# Altium PCB alarm_to_uart.PcbDoc
Units mm, origin at the board's own origin, x right, y up, seen from the top; angles counter-clockwise.
Board outline 46 x 32 mm, 2 copper layers (Top Layer, Bottom Layer); 22 components, 13 nets, 65 pads, 18 vias.
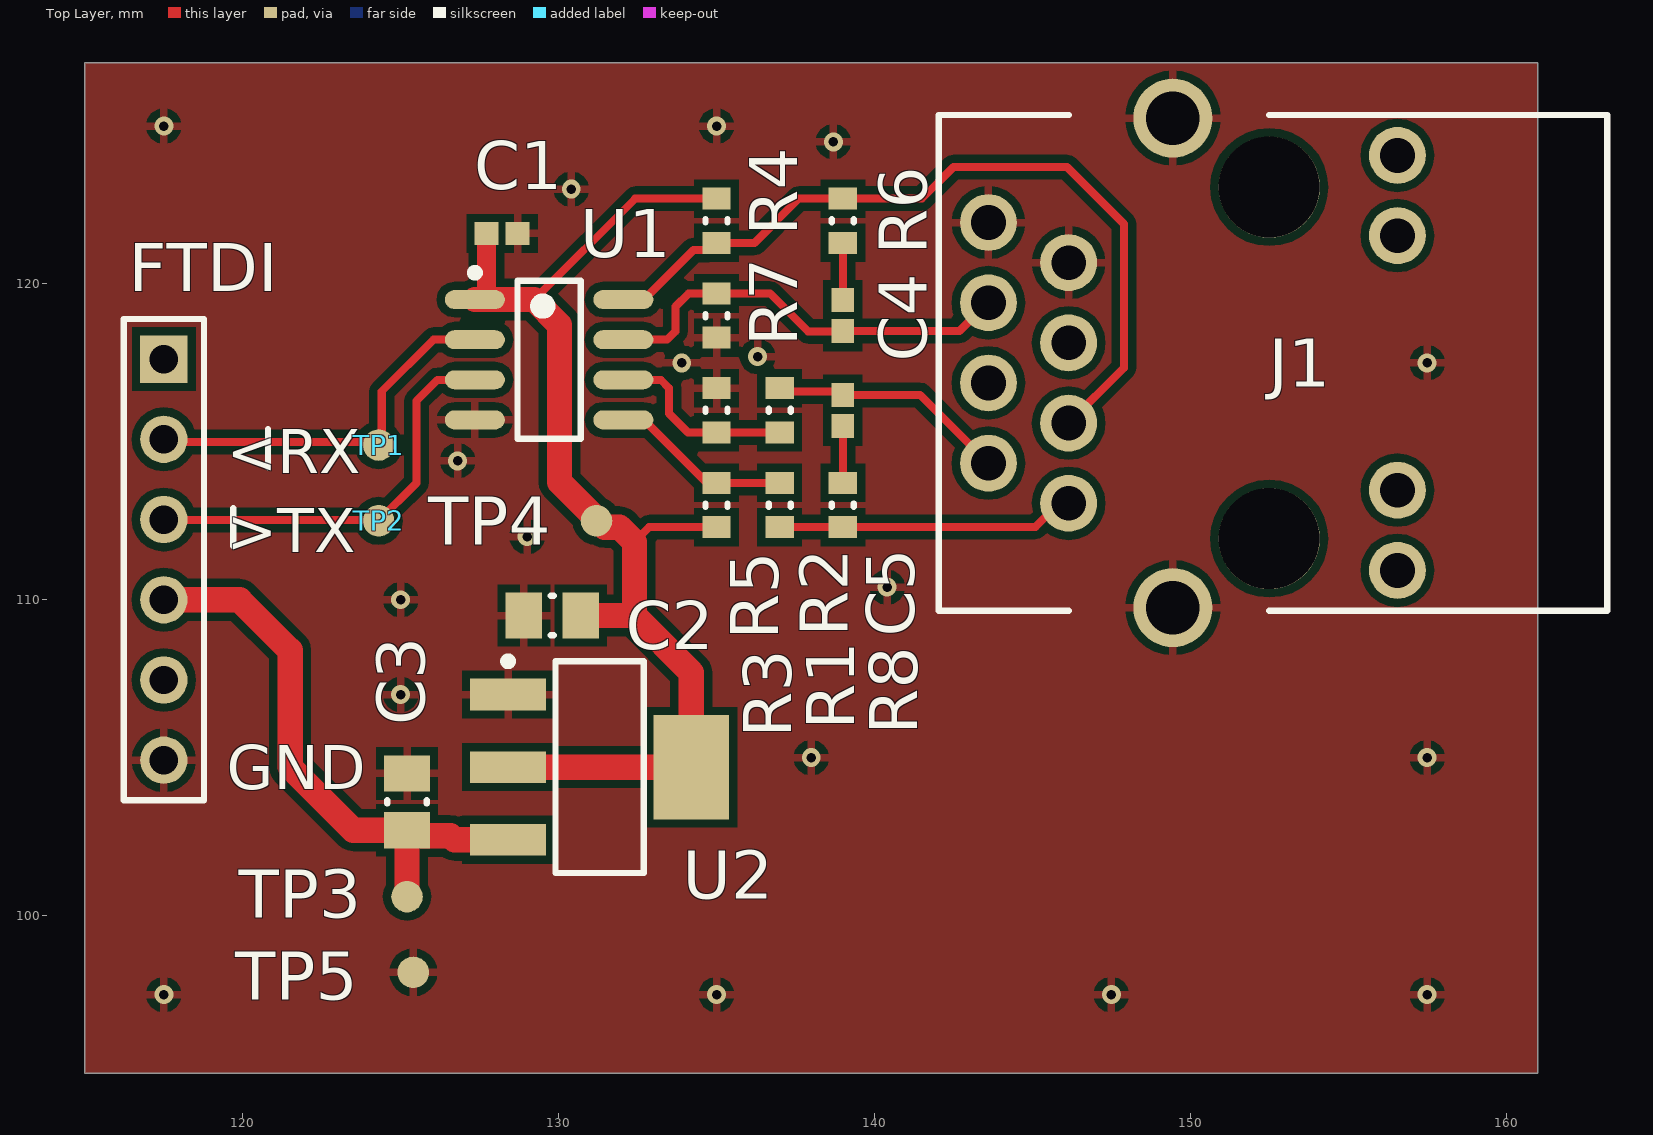
[diagram p0: Top Layer view]
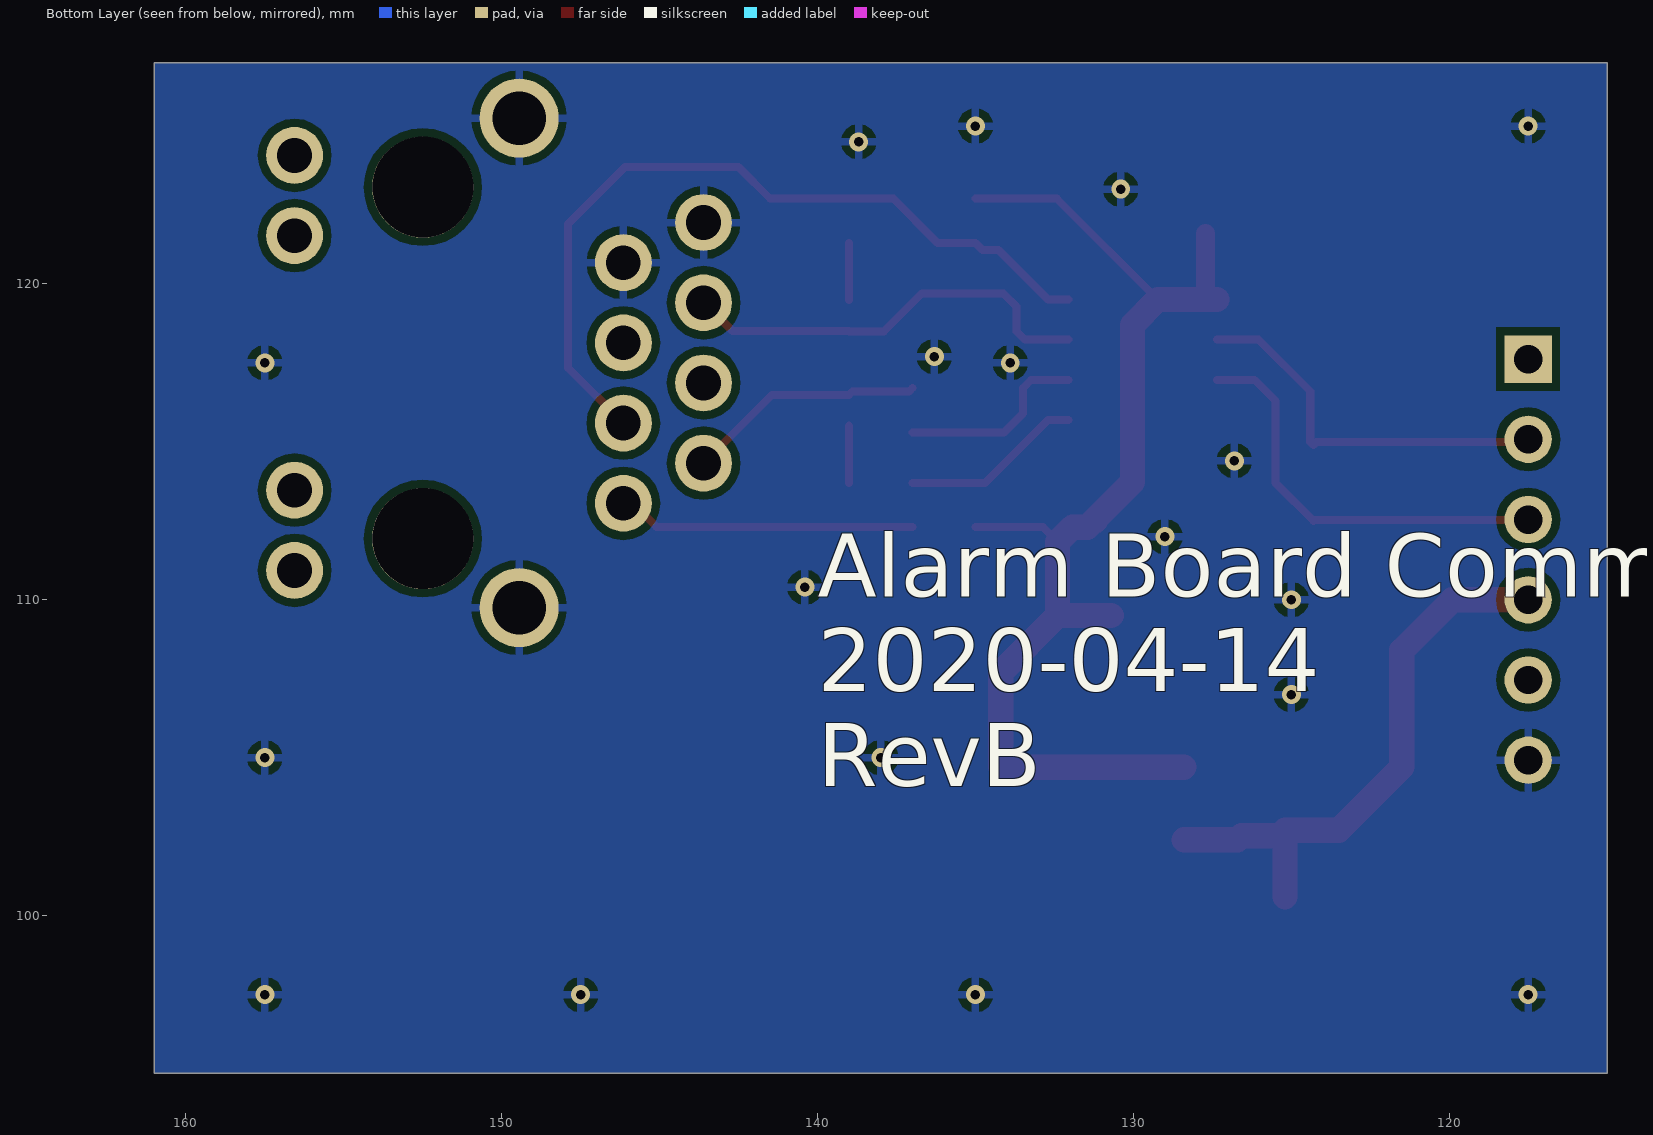
[diagram p1: Bottom Layer view, seen from below]

## Layer stack, top to bottom
Top Solder: solder mask 0.0102, Solder Resist, Dk 3.5
Top Layer: signal copper 0.0356
Dielectric 1: dielectric 0.32, FR-4, Dk 4.8
Bottom Layer: signal copper 0.0356
Bottom Solder: solder mask 0.0102, Solder Resist, Dk 3.5

## Board outline
115,95 161,95 161,127 115,127

## Design rules (kind name [scope] priority, off if disabled: settings)
Clearance [All] p1: gap=0.254 ignorepadtopadclearanceinfootprint=FALSE except(0: Arc-Hole Track-Hole SMDPad-Hole THPad-Hole Via-Hole Fill-Hole Poly-Hole Region-Hole Text-Hole)
PolygonConnect [All] p1: connectstyle=Relief reliefconductorwidth=0.254 reliefentries=4 polygonreliefangle="90 Angle" airgapwidth=0.254
RoomDefinition Sheet4 [InComponentClass('Sheet4')] p1: confinementstyle=ConfineIn formatcopy=TRUE lockcomponents=FALSE outline 105,83 171,83 171,135 105,135
RoutingVias [All] p1: holewidth=0.711 width=1.27 viastyle="Through Hole" minholewidth=0.711 minwidth=1.27 maxholewidth=0.711 maxwidth=1.27
SolderMaskExpansion [All] p1: expansion=0.102 istentingtop=FALSE
Width [All] p1: maxlimit=0.8 minlimit=0.254 preferedwidth=0.254
30 further rules are at their usual default settings.

## Components (designator, comment, footprint, x,y, rotation, side; value= is the part's Value field where it differs from the comment)
C1 "GRM155R71C104KA88D" CAPC1005X55X25ML05T10 128.21,121.6 r180 top
C2 "CAP 10uF 10V 0805(2012)" CAPC0805(2012)145_N 129.8,109.5 r0 top value=10uF
C3 "CAP 10uF 10V 0805(2012)" CAPC0805(2012)145_N 125.2,103.6 r270 top value=10uF
C4 "TBD" CAPC1005X55X25ML05T10 139,119 r90 top
C5 "TBD" CAPC1005X55X25ML05T10 139,116 r270 top
FTDI "Header 6" HDR1X6 117.5,117.62 r270 top
J1 "RJ45_59_8P8C_LED" RJ45_59_8P8C_LED 152.5,117.5 r90 top
R1 "50R" RESC0603(1608)_L 137,113 r90 top value="120.00 Ohm"
R2 "50R" RESC0603(1608)_L 137,116 r270 top value="120.00 Ohm"
R3 "10k" RESC0603(1608)_L 135,113 r90 top value="120.00 Ohm"
R4 "10k" RESC0603(1608)_L 135,122 r270 top value="120.00 Ohm"
R5 "10k" RESC0603(1608)_L 135,116 r90 top value="120.00 Ohm"
R6 "100R" RESC0603(1608)_L 139,122 r270 top value="120.00 Ohm"
R7 "10k" RESC0603(1608)_L 135,119 r270 top value="120.00 Ohm"
R8 "100R" RESC0603(1608)_L 139,113 r90 top value="120.00 Ohm"
TP1 "TEST_POINT" TP-SMD-1mm 124.3,114.9 r270 top
TP2 "TEST_POINT" TP-SMD-1mm 124.299,112.5 r270 top
TP3 "TEST_POINT" TP-SMD-1mm 125.2,100.6 r270 top
TP4 "TEST_POINT" TP-SMD-1mm 131.2,112.5 r270 top
TP5 "TEST_POINT" TP-SMD-1mm 125.4,98.2 r270 top
U1 "ADM3488ARZ" ADI-R-8_L 129.7,117.6 r0 top
U2 "LD1117S33CTR" SOT-223_N 131.3,104.7 r0 top

## Footprints (in the part's own frame and the unit in brackets; to place one, negate y for a bottom-side part, rotate by r counter-clockwise, add the part's x,y. Pads: shape width x height; smd on the part's side, far side on the other; paste and mask are expansions set on the pad)
ADI-R-8_L [mm] "SOIC, 8-Leads, Body 5x4mm, Pitch 1.27mm, IPC High Density"
  oval 1.9x0.6 smd: 1(-2.35,1.905) 2(-2.35,0.635) 3(-2.35,-0.635) 4(-2.35,-1.905) 5(2.35,-1.905) 6(2.35,-0.635) 7(2.35,0.635) 8(2.35,1.905)
  silkscreen extent -2.47,-2.5 1,2.88, body extent -2,-2.5 2,2.5, height 1.75
CAPC0805(2012)145_N [mm] "Chip Capacitor, Body 2.0x1.2mm, Height 1.45mm, IPC Medium Density"
  rect 1.15x1.45 smd: 1(-0.9,0) 2(0.9,0)
  silkscreen extent -0.05,-0.62 0.05,0.63, body extent -1.1,-0.72 1.1,0.73, height 1.45
CAPC1005X55X25ML05T10 [mm] "Chip Capacitor, 2-Leads, Body 1.00x0.50mm, IPC Low Density"
  rect 0.76x0.72 smd: 1(-0.49,0) 2(0.49,0)
  body extent -0.53,-0.28 0.53,0.27, height 0.55
HDR1X6 [mm] "Connector; Header; 6 Position"
  rect 1.5x1.5 hole 0.9: 1(0,0)
  round 1.5 hole 0.9: 2(2.54,0) 3(5.08,0) 4(7.62,0) 5(10.16,0) 6(12.7,0)
  silkscreen extent -1.27,-1.27 13.97,1.27
RESC0603(1608)_L [mm] "Chip Resistor, Body 1.6x0.8mm, IPC High Density"
  rect 0.7x0.9 smd: 1(-0.7,0) 2(0.7,0)
  silkscreen extent -0.05,-0.35 0.05,0.35, body extent -0.85,-0.47 0.85,0.47, height 0.6
RJ45_59_8P8C_LED [mm] "Generic RJ49 jack with LED and without magnetics"
  round 1.8 hole 1.1: 1(-4.445,6.35) 2(-3.175,8.89) 3(-1.905,6.35) 4(-0.635,8.89) 5(0.635,6.35) 6(1.905,8.89) 7(3.175,6.35) 8(4.445,8.89) 9(-6.57,-4.06) 10(-4.03,-4.06) 11(4.03,-4.06) 12(6.57,-4.06)
  round 3.2 hole 3.2 unplated: POS1(-5.565,0) POS2(5.565,0)
  round 2.5 hole 1.7: S1(-7.75,3.05) S2(7.75,3.05)
  silkscreen extent -7.85,-10.7 7.85,10.46, body extent -7.85,-10.58 7.85,10.58, height 13.45
SOT-223_N [mm] "SOT223, 4-Leads, Body 6.5x3.5mm, Pitch 2.3mm, Lead Span 7mm, IPC Medium Density"
  rect 2.4x1 smd: 1(-2.9,2.3) 2(-2.9,0) 3(-2.9,-2.3)
  rect 2.4x3.3 smd: 4(2.9,0)
  silkscreen extent -3.02,-3.35 1.4,3.47, body extent -1.85,-3.35 1.85,3.35, height 1.8
TP-SMD-1mm [mm] "Test point, round, 1mm, SMD"
  round 1 smd paste-999: 1(0,0)

## Part data
C1 C4 C5: library part CMP-2100-03641-1, "Chip Capacitor, 0.1 uF, +/- 10%, 16 V, -55 to 125 degC, 0402 (1005 Metric), RoHS, Tape and Reel", Capacitance=100nF, Case Code (Imperial)=0402, Case Code (Metric)=1005, Dielectric=X7R, Dielectric Material=Ceramic, Insulation Resistance=10GR, Manufacturer=Murata, Max Operating Temperature=125degC, Min Operating Temperature=-55degC, Package Description="2-Pin Surface Mount Device, Body 1 x 0.5 mm", Package Quantity=1, Tolerance=10%, Voltage=16V, Case/Package=0402, Datasheet URL=http://psearch.en.murata.com/capacitor/product/GRM155R71C104KA88%23.pdf, Datasheet Version=42675.0, Depth=0.5mm, Height=0.5mm, Lead Free=LeadFree, Length=1mm, Manufacturer URL=http://www.murata.com/, Material=Ceramic, Mount=SurfaceMount, Number of Pins=2, Package Reference=0402, Packaging=TapeandReel, Radiation Hardening=No, REACH SVHC=NoSVHC, RoHSCompliant=true, Termination=SMD/SMT, Thickness=0.022inch, Voltage Rating=16V, Voltage Rating (DC)=16V, Width=0.5mm
C2 C3: library part CMP-1036-04922-1, "CAP 10uF 10V ±10% 0805 (2012 Metric) Thickness 1.45mm SMD", Case-EIA=0805, Case-Metric=2012, Rated Voltage="10 V", Tolerance=Â±10%, Max Thickness="1.45 mm", Technology=SMT
FTDI: "Header, 6-Pin", LatestRevisionDate=17-Jul-2002, LatestRevisionNote="Re-released for DXP Platform.", Publisher="Altium Limited"
J1: "Generic RJ49 jack with LED and without magnetics", Manufacturer=Unknown/Generic, PartNumber=RJ45_59_8P8C_LED
R1 R2 R3 R4 R5 R6 R7 R8: library part CMP-1012-00052-1, "120R 0.1W 5% 0603 (1608 Metric)  SMD", Case-EIA=0603, Case-Metric=1608, Power="0.1 W", Tolerance="5 %", Technology=SMT
TP1 TP2 TP3 TP4 TP5: "Test point"
U1: library part CMP-0535-00058-1, "3.3 V Slew Rate Limited, Full-Duplex, RS-485/RS-422 Transceivers, 3 to 3.6 V, -40 to 85 degC, 8-Pin SOIC (R-8), RoHS, Tube", Manufacturer="Analog Devices", Supply Voltage="3 to 3.6 V", Temperature Range="-40 to 85 degC", ComponentLink1Description="Manufacturer URL", ComponentLink1URL=http://www.analog.com/en/index.html, ComponentLink2Description=Datasheet, ComponentLink2URL=http://www.analog.com/static/imported-files/data_sheets/ADM3483_3485_3488_3490_3491.pdf, ComponentLink3Description="Package Specification", ComponentLink3URL=http://www.analog.com/media/en/package-pcb-resources/package/pkg_pdf/soic_narrow-r/r_8.pdf, DatasheetVersion="Rev. E", Duplex=Full, Guaranteed Data Rate="0.25 Mbps", Mounting Technology="Surface Mount", Number of Drivers=1, PackageDescription="8-Pin Standard Small Outline Package, Body 4.9 x 3.9 mm, Pitch 1.27 mm", PackageVersion=06/2006, Packing=Tube, PartNumber=ADM3488ARZ, Receiver Hysteresis="50 mV", RoHS=TRUE
U2: library part CMP-0244-00307-1, "Fixed Low Drop Positive Voltage Regulator, 3.3V, 4-Pin SOT-223, Tape and Reel", ComponentLink1Description="Manufacturer URL", ComponentLink1URL=http://www.st.com, ComponentLink2Description=Datasheet, ComponentLink2URL=http://www.st.com/internet/com/TECHNICAL_RESOURCES/TECHNICAL_LITERATURE/DATASHEET/CD00000544.pdf, DatasheetVersion=1/11/2011, PackageDescription="4-Pin SOT-223 Package, 6.5 x 3.5 mm Body, 2.3 mm Pitch, 7 mm Lead Span", PackageReference=SOT-223, PackageVersion=2010

## Via types
v1: diameter 0.6, hole 0.3, Top Layer to Bottom Layer, 18 vias

## Nets (pads, with @x,y where several pads share a name; then routed paths per layer and width w, separated by ;. In a path a pad name is that pad's centre, name@x,y a point inside that pad or via, vN(x,y) a via of type N, cw(c..) or ccw(c..) an arc to the next point about the centre after c; other vN are vias at no path point)
5V: C3.2 FTDI.4 TP3.1 U2.3 | length 18.3
  Top Layer w0.8: FTDI.4 119.9,110 121.5,108.4 121.5,104.7 123.5,102.7 C3.2 ; TP3.1 C3.2 ; U2.3 126.7,102.4 126.575,102.525 125.375,102.525 C3.2
+3.3V: C1.2 C2.2 R3.1 R4.1 TP4.1 U1.1 U2.2 U2.4 | length 38.6
  Top Layer w0.254: 129.231,119.505 132.426,122.7 R4.1 ; 132.4,111.831 132.869,112.3 R3.1
  Top Layer w0.6: U1.1@127.72,119.605 C1.2
  Top Layer w0.8: U1.1 U1.1@127.62,119.505 ; U1.1@127.72,119.605 U1.1@127.62,119.505 ; U2.2 U2.4 134.2,107.7 132.4,109.5 ; C2.2 132.4,109.5 ; U1.1@127.62,119.505 129.231,119.505 130.03,118.706 130.03,113.724 131.2,112.554 TP4.1 131.254,112.5 131.454,112.3 131.931,112.3 132.4,111.831 132.4,109.5
GND: C1.1 C2.1 C3.1 FTDI.6 J1.7 J1.8 J1.S1 J1.S2 R5.2 R7.2 TP5.1 U1.4 U2.1
  other v1: 117.5,97.5 135,97.5 147.5,97.5 157.5,97.5 138,105 157.5,105 125,107 125,110 140.4,110.4 129,112 126.8,114.4 133.9,117.5 157.5,117.5 136.3,117.7 130.4,123 138.7,124.5 117.5,125 135,125
NetC4_2: C4.2 R6.2 | length 1.8
  Top Layer w0.254: C4.2 R6.2
NetC5_2: C5.2 R8.2 | length 1.8
  Top Layer w0.254: R8.2 C5.2
NetR1_2: R1.2 R3.2 U1.5 | length 5.8
  Top Layer w0.254: U1.5 132.7,115.695 134.695,113.7 R3.2 R1.2
NetR2_2: R2.2 R5.1 U1.6 | length 6.1
  Top Layer w0.254: U1.6 133.235,116.965 133.5,116.7 133.5,115.9 134.1,115.3 R5.1 R2.2
SENSOR_RX+: J1.3 R4.2 R6.1 U1.8 | length 25.4
  Top Layer w0.254: U1.8 132.7,119.505 134.272,121.077 134.777,121.077 R4.2 136.2,121.3 137.6,122.7 R6.1 141.5,122.7 142.5,123.7 146.1,123.7 147.9,121.9 147.9,117.345 J1.3
SENSOR_RX-: C4.1 J1.6 R7.1 U1.7 | length 13.5
  Top Layer w0.254: U1.7 133.435,118.235 133.7,118.5 133.7,119.282 134.118,119.7 136.7,119.7 137.9,118.5 138.99,118.5 C4.1 142.693,118.51 143.588,119.405 J1.6
SENSOR_TX+: J1.1 R1.1 R8.1 | length 9.5
  Top Layer w0.254: R1.1 R8.1 145.093,112.3 145.848,113.055 J1.1
SENSOR_TX-: C5.1 J1.2 R2.1 | length 7.6
  Top Layer w0.254: R2.1 137.105,116.595 138.895,116.595 C5.1 141.445,116.49 J1.2
USART1_RX: FTDI.2 TP1.1 U1.2 | length 12.2
  Top Layer w0.254: FTDI.2 117.59,114.99 124.21,114.99 TP1.1 124.4,115 124.4,116.6 126.035,118.235 U1.2
USART1_TX: FTDI.3 TP2.1 U1.3 | length 13.2
  Top Layer w0.254: FTDI.3 117.52,112.52 124.279,112.52 TP2.1 125.5,113.701 125.5,116.3 126.165,116.965 U1.3
pads on no net: FTDI.1 FTDI.5 J1.4 J1.5 J1.9 J1.10 J1.11 J1.12 J1.POS1 J1.POS2

## Polygon pours and split planes (outlines as drawn)
GND on Bottom Layer "GND_L02_P000" (solid, pour order 0): 115,95 161,95 161,127 115,127
GND on Top Layer "GND_L01_P001" (solid, pour order 1): 115,95 161,95 161,127 115,127

## Silkscreen, mask and mechanical layers (free items; w line width, h text height)
Top Overlay:
  lines w0.2: 119.7,111.7 119.7,112.9 ; 120.8,114.2 120.8,115.4
  text "<RX" at 119.5,114 h1.4
  text ">TX" at 119.5,111.5 h1.4
  text "GND" at 119.5,104 h1.4
Bottom Overlay:
  text "Alarm Board Comms / 2020-04-14 / RevB" at 140,104.1 h2
Mechanical 1:
  the board outline again, w0.1

## Dimensions
115,95 to 161,95 on Dimensions
115,95 to 115,127 on Dimensions